# Altium PCB COMECA-TestPCB.PcbDoc
Units mil, origin at the board's own origin, x right, y up, seen from the top; angles counter-clockwise.
Board outline 2900 x 3900 mil, 2 copper layers (Top Layer, Bottom Layer); 19 components, 25 nets, 161 pads, 2 vias.
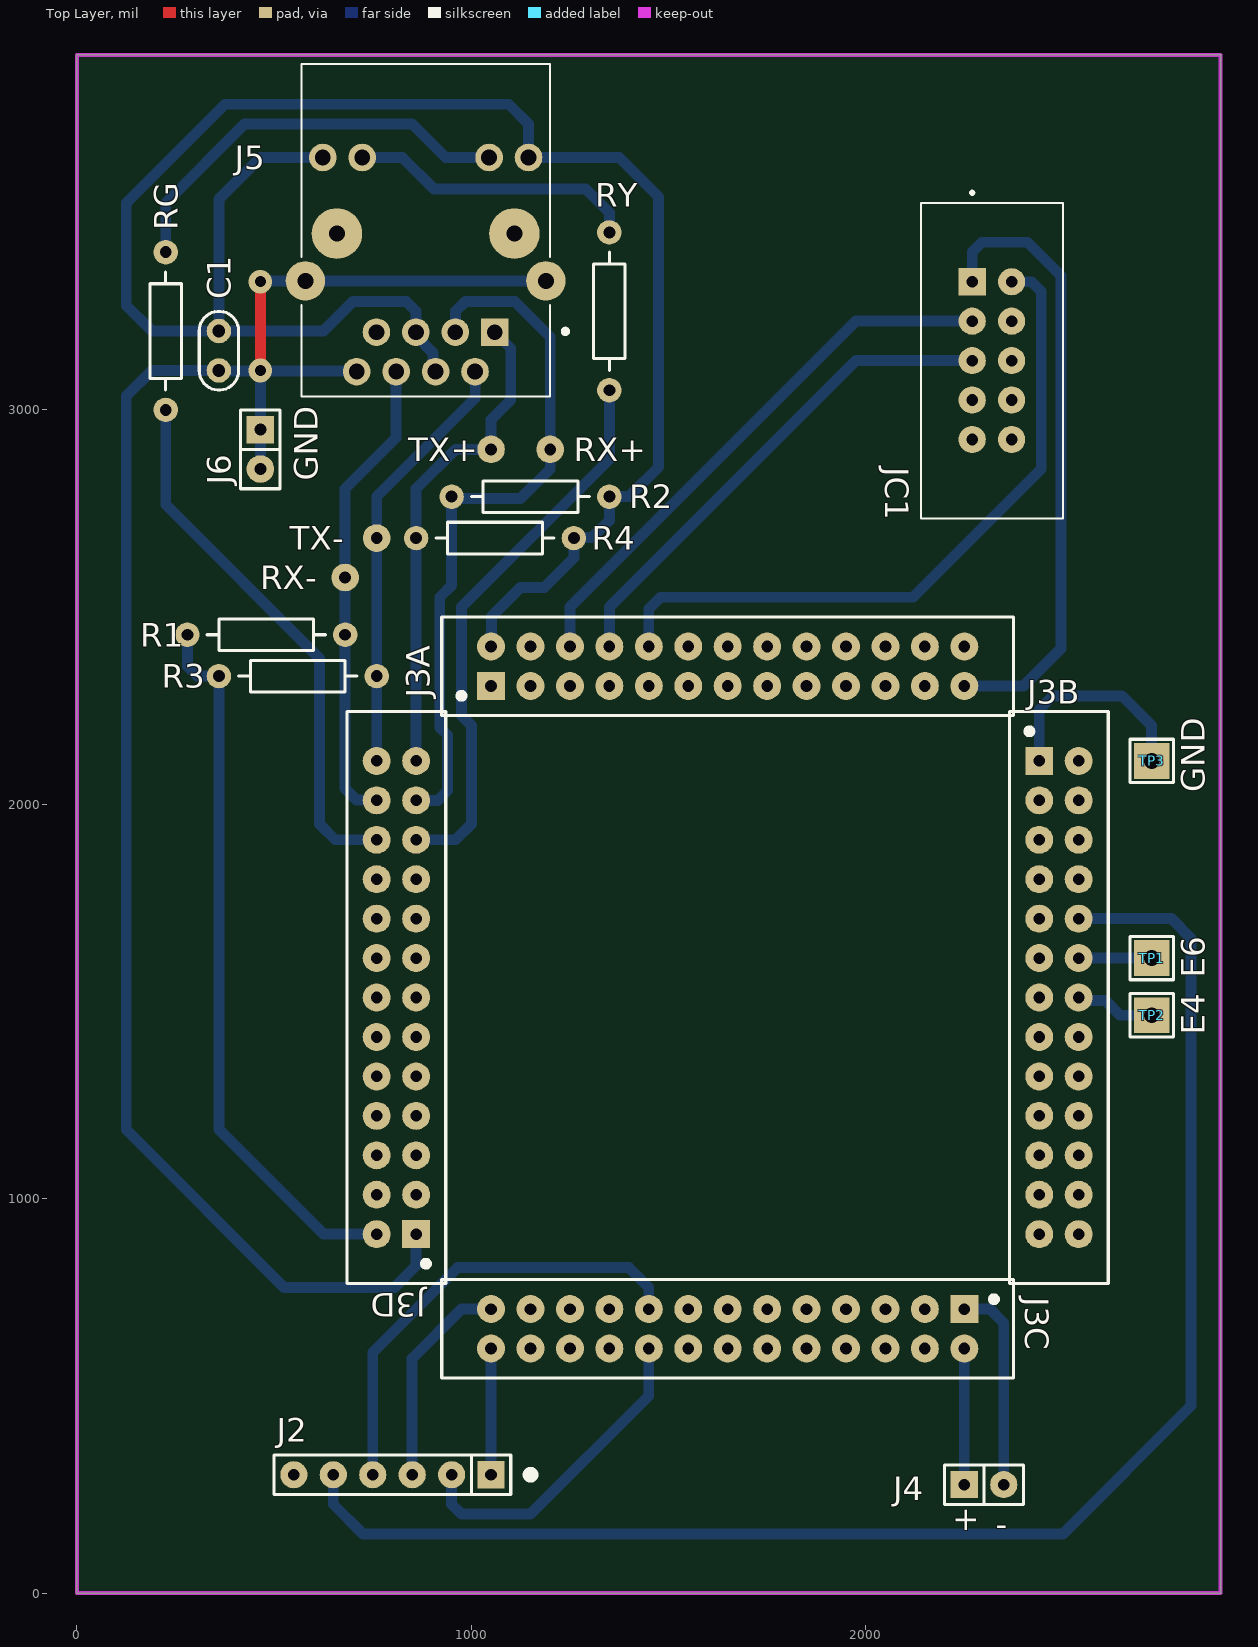
[diagram p0: Top Layer view]
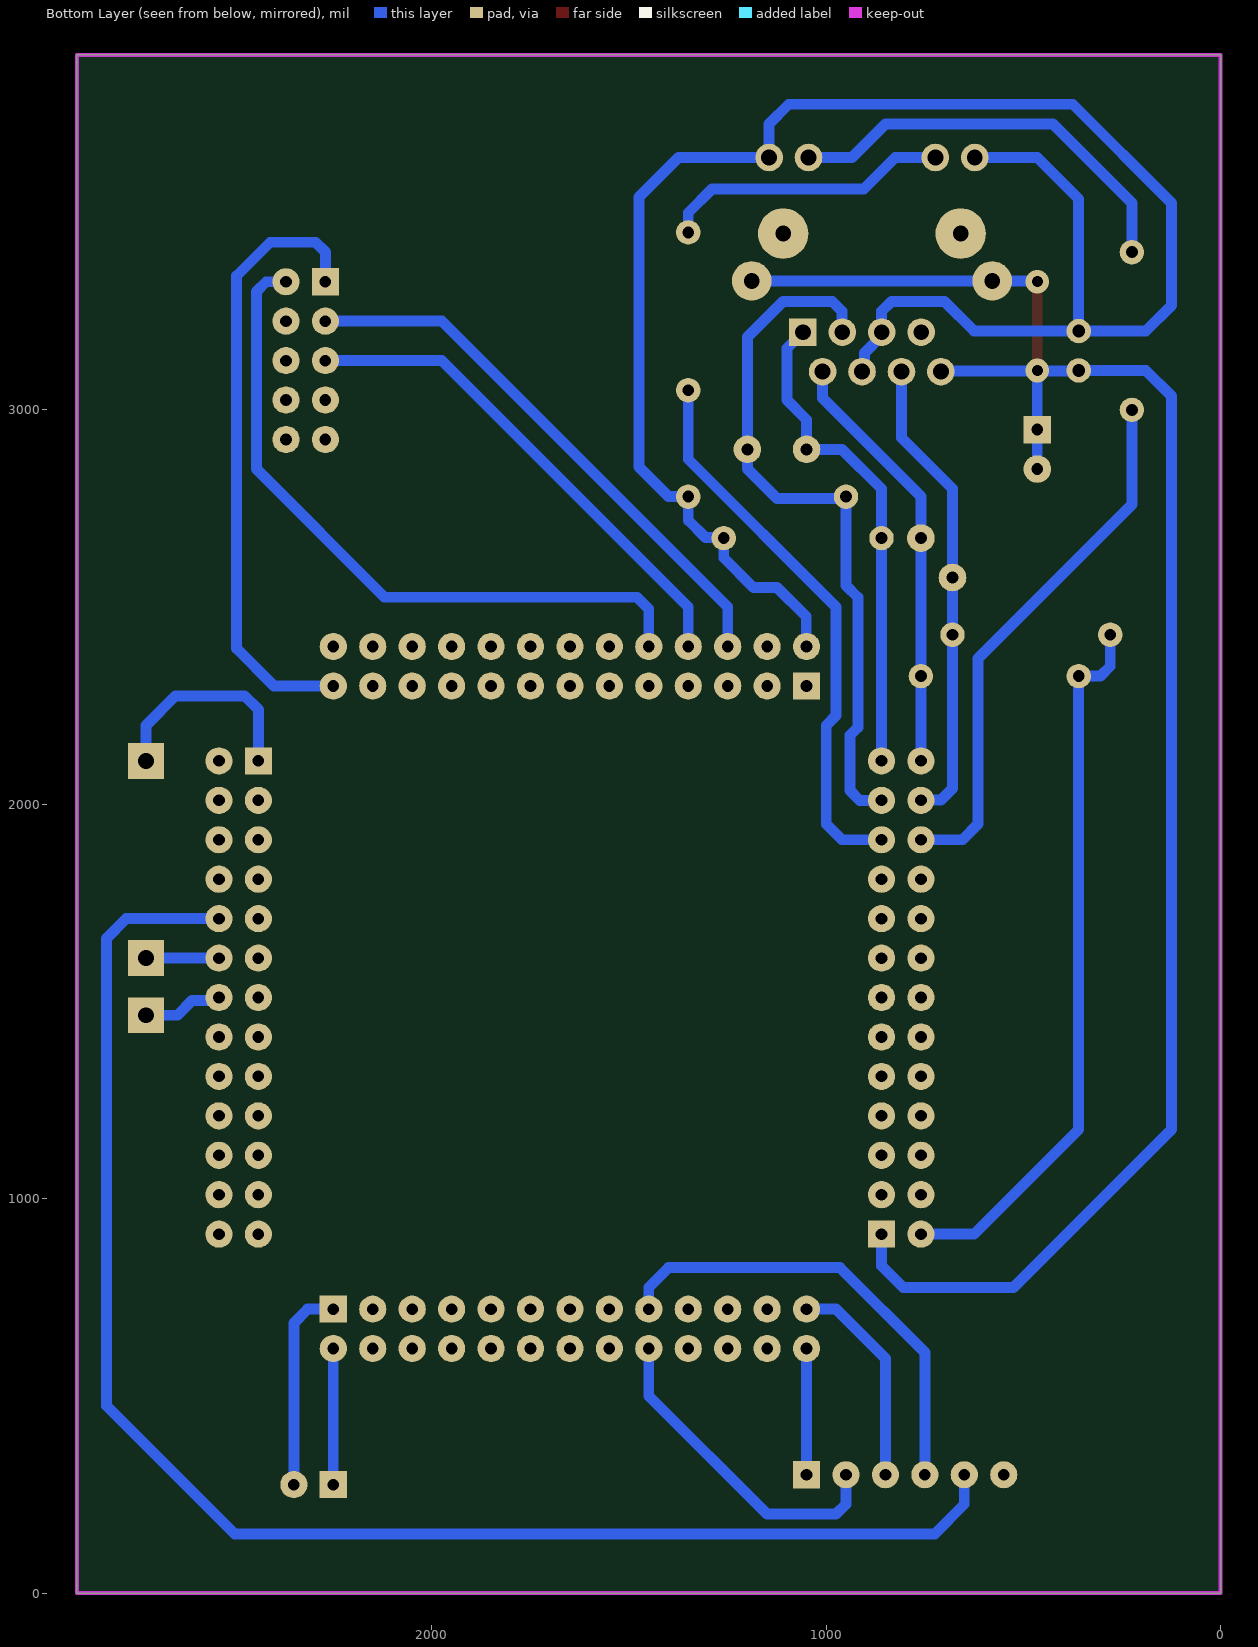
[diagram p1: Bottom Layer view, seen from below]

## Layer stack, top to bottom
Top Solder: solder mask 0.4, Solder Resist, Dk 3.5
Top Layer: signal copper 1.4
Dielectric 1: dielectric 12.6, FR-4, Dk 4.8
Bottom Layer: signal copper 1.4
Bottom Solder: solder mask 0.4, Solder Resist, Dk 3.5

## Board outline
0,0 2900,0 2900,3900 0,3900

## Design rules (kind name [scope] priority, off if disabled: settings)
Clearance [All] p1: gap=19.68 ignorepadtopadclearanceinfootprint=FALSE
PolygonConnect [All] p1: connectstyle=Relief reliefconductorwidth=10 reliefentries=4 polygonreliefangle="90 Angle" airgapwidth=10
RoutingVias [All] p1: holewidth=28 width=50 viastyle="Through Hole" minholewidth=28 minwidth=50 maxholewidth=28 maxwidth=60
SolderMaskExpansion [All] p1: expansion=4 istentingtop=FALSE
Width [All] p1: maxlimit=39.37 minlimit=19.68 preferedwidth=27.56
30 further rules are at their usual default settings.

## Components (designator, comment, footprint, x,y, rotation, side; value= is the part's Value field where it differs from the comment)
C1 "33nF" CAP100 360,3150 r270 top
J2 "PROGRAMADOR" SIP6 1050,300 r180 top
J3A "SIP13" "SIP13*2 - HDR" 1050,2300 r0 top
J3B "SIP13" "SIP13*2 - HDR" 2440,2110 r270 top
J3C "SIP13" "SIP13*2 - HDR" 2250,720 r180 top
J3D "SIP13" "SIP13*2 - HDR" 860,910 r90 top
J4 "VCC_EXT" SIP2#1 2300,275 r0 top
J5 "HR911105A" HANRUN_HR911105A 884.17,3447.09 r0 top
J6 "GND" SIP2#2 465,2900 r270 top
JC1 "CAL_TEST" "TE_5104338-1 - 90DEG" 2270,3325 r90 top
R1 "49" RES400 680,2430 r180 top
R2 "49" RES400 950,2780 r0 top
R3 "49" RES400 760,2325 r180 top
R4 "49" RES400 860,2675 r0 top
RG "330" RES400 225,3000 r90 top
RY "330" RES400 1350,3050 r90 top
TP1 "E6" TPTH 2725,1610 r0 top
TP2 "E4" TPTH 2725,1465 r0 top
TP3 "GND-3" TPTH 2725,2110 r0 top

## Footprints (in the part's own frame and the unit in brackets; to place one, negate y for a bottom-side part, rotate by r counter-clockwise, add the part's x,y. Pads: shape width x height; smd on the part's side, far side on the other; paste and mask are expansions set on the pad)
CAP100 [mil]
  round 62 hole 32: 1(-50,0) 2(50,0)
  silkscreen extent -100,-50 100,50, body extent -115,-33 115,34, height 241
HANRUN_HR911105A [mil]
  rect 70x70 hole 40: 1(175.2,-250)
  round 70 hole 40: 2(125.2,-350) 3(75.2,-250) 4(25.2,-350) 5(-24.8,-250) 6(-74.8,-350) 7(-124.8,-250) 8(-174.8,-350) 9(260.83,192.91) 10(160.83,192.91) 11(-160.83,192.91) 12(-260.83,192.91)
  round 100 hole 40: 15(304.92,-120.08) 16(-304.92,-120.08)
  round 127.95 hole 40 unplated: ""(-225,0) ""(225,0)
  silkscreen extent -315,-413 360,430
RES400 [mil]
  round 62 hole 30: 1(0,0) 2(400,0)
  silkscreen extent 50,-40 350,40, body extent -12,-45 412,46, height 96
SIP2#1 [mm]
  rect 1.75x1.75 hole 0.75: 1(-1.27,0)
  round 1.75 hole 0.75: 2(1.27,0)
  silkscreen extent -2.54,-1.27 2.54,1.27
SIP2#2 [mm]
  rect 1.778x1.778 hole 0.762: 1(-1.27,0)
  round 1.778 hole 0.762: 2(1.27,0)
  silkscreen extent -2.54,-1.27 2.54,1.27
SIP6 [mm]
  rect 1.75x1.75 hole 0.75: 1(0,0)
  round 1.75 hole 0.75: 2(2.54,0) 3(5.08,0) 4(7.62,0) 5(10.16,0) 6(12.7,0)
  silkscreen extent -1.27,-1.27 13.97,1.27, body extent -1.27,-1.3 13.97,1.24, height 8.38
"SIP13*2 - HDR" [mm]
  rect 1.8x1.8 / inner rect 1.75x1.75 / far side rect 1.75x1.75 hole 0.75: 1(0,0)
  round 1.8 / inner round 1.75 / far side round 1.75 hole 0.75: 2(0,2.54) 3(2.54,0) 4(2.54,2.54) 5(5.08,0) 6(5.08,2.54) 7(7.62,0) 8(7.62,2.54) 9(10.16,0) 10(10.16,2.54) 11(12.7,0) 12(12.7,2.54) 13(15.24,0) 14(15.24,2.54) 15(17.78,0) 16(17.78,2.54) 17(20.32,0) 18(20.32,2.54) 19(22.86,0) 20(22.86,2.54) 21(25.4,0) 22(25.4,2.54) 23(27.94,0) 24(27.94,2.54) 25(30.48,0) 26(30.48,2.54)
  silkscreen extent -3.17,-1.91 33.65,4.44, body extent -1.52,-1.21 32,3.75, height 8.51
"TE_5104338-1 - 90DEG" [mm]
  rect 1.75x1.75 hole 0.75: 1(0,0)
  round 1.75 hole 0.75: 2(0,-2.54) 3(-2.54,0) 4(-2.54,-2.54) 5(-5.08,0) 6(-5.08,-2.54) 7(-7.62,0) 8(-7.62,-2.54) 9(-10.16,0) 10(-10.16,-2.54)
  silkscreen extent -15.24,-5.84 5.83,3.3, body extent -15.24,-12.19 5.08,0.32, height 9.27
TPTH [mm]
  rect 2.3x2.3 hole 1.016: 1(0,0)
  silkscreen extent -1.4,-1.4 1.4,1.4, body extent -1.27,-1.27 1.27,1.27, height 6.04

## Part data
C1: library part CAP
J2: library part CON6
J3A J3B J3C J3D: library part CON13*2
J4 J6: library part CON2
J5: "HR911105A Ethernet Interface Arduino Platform Evaluation Expansion Board", Package=None, Availability=Unavailable, MF=DFRobot, MP=HR911105A, Price=None, SnapEDA_Link=https://www.snapeda.com/parts/HR911105A/DFRobot/view-part/214807/?ref=snap
JC1: library part 5104338-1, "HEADER; PIN; AMP-LATCH; 10 POS; 2.54 X 2.54; VERTICAL; LOW PROFILE; PCB", Package=None, Availability=Unavailable, MF="TE Connectivity", MP=5104338-1, Price=None, SnapEDA_Link=https://www.snapeda.com/parts/5104338-1/TE%20Connectivity%20AMP%20Connectors/view-part/2881080/?ref=snap, TE_purchase_URL=https://www.te.com/usa-en/product-5104338-1.html?te_bu=Cor&te_type=disp&te_campaign=seda_glo_cor-seda-global-disp-prtnr-fy19-seda-model-bom-cta_sma-317_1&elqCampaignId=32493
R1 R2 R3 R4 RG RY: library part RES
TP1 TP2 TP3: library part TP

## Free pads (board coordinates)
  round 70 hole 30: 2(680,2575) 4(760,2675) 5(1050,2900) 6(1200,2900)

## Via types
v1: diameter 60, hole 28, Top Layer to Bottom Layer, 2 vias

## Nets (pads, with @x,y where several pads share a name; then routed paths per layer and width w, separated by ;. In a path a pad name is that pad's centre, name@x,y a point inside that pad or via, vN(x,y) a via of type N, cw(c..) or ccw(c..) an arc to the next point about the centre after c; other vN are vias at no path point)
3V3: J2.1 J3C.26 | length 320
  Bottom Layer w27.56: J2.1 J3C.26
3V3-1: C1.1 J3A.2 J5.4 J5.5 J5.9 J5.12 R2.2 R4.2 | length 4886.6
  Bottom Layer w27.56: J5.12 465,3640 360,3535 C1.1 ; J5.4 903.16,3103.29 903.16,3144.52 859.37,3188.31 J5.5 860,3197.72 860,3250 835,3275 700,3275 625,3200 C1.1 ; J3A.2 1050.79,2400.79 1050.79,2475.79 1125,2550 1185,2550 1260,2625 R4.2 1261.09,2676.09 1306.09,2676.09 1350,2720 R2.2 1400,2780 1475,2855 1475,3540 1375,3640 J5.9 1145,3725 1095,3775 375,3775 125,3525 125,3265 190,3200 C1.1
3V3-2: J3D.2 R1.2 R3.2 | length 1830.1
  Bottom Layer w27.56: R1.2 280,2350 305,2325 R3.2 360,1175 625,910 J3D.2
CLK: J3A.6 JC1.3 | length 1420.3
  Bottom Layer w27.56: J3A.6 1250,2500 1975,3225 JC1.3
DATA: J3A.10 JC1.2 | length 1772.4
  Bottom Layer w27.56: J3A.10 1450,2495 1480,2525 2120,2525 2445,2850 2445,3300 2420,3325 JC1.2
GND: J2.3 J3C.25 | length 546.8
  Bottom Layer w27.56: J2.3 850,595 975,720 J3C.25
GND-1: J3A.25 JC1.1 | length 1574.9
  Bottom Layer w27.56: J3A.25 2400,2300 2495,2395 2495,3340 2410,3425 2295,3425 2270,3400 JC1.1
GND-2: C1.2 J3D.1 J5.8 J5.15 J5.16 J6.1 J6.2 | length 4675.9
  Top Layer w27.56: v1(465,3100) v1(465,3325)
  Bottom Layer w27.56: J6.2 J6.1 v1@465,3098.54 ; v1(465,3100) v1@465,3098.54 ; v1(465,3325) 467.01,3327.01 J5.16 J5.15 ; J5.8 707.91,3098.54 v1@465,3098.54 ; J3D.1 860,830 805,775 525,775 125,1175 125,3035 190,3100 C1.2 361.46,3098.54 v1@465,3098.54
GND_EXT: J3C.1 J4.2 | length 528
  Bottom Layer w27.56: J3C.1 2315,720 2350,685 J4.2 J4.2@2352.5,277.5
LED1: J3D.22 RG.1 | length 1373.1
  Bottom Layer w27.56: RG.1 225,2760 615,2370 615,1950 655,1910 J3D.22
LED2: J3D.21 RY.1 | length 1422.3
  Bottom Layer w27.56: J3D.21 960,1910 1000,1950 1000,2200 975,2225 975,2500 1350,2875 RY.1
NetJ3B_1: J3B.1 TP3.1 | length 550.6
  Bottom Layer w27.56: J3B.1 2440,2240 2475,2275 2650,2275 2725,2200 TP3.1
NetJ3B_12: J3B.12 TP1.1 | length 185
  Bottom Layer w27.56: J3B.12 TP1.1
NetJ3B_14: J3B.14 TP2.1 | length 203.6
  Bottom Layer w27.56: J3B.14 2547.91,1502.09 2607.91,1502.09 2645,1465 TP2.1
NetJ5_10: J5.10 RG.2 | length 1063.1
  Bottom Layer w27.56: RG.2 225,3525 425,3725 850,3725 935,3640 J5.10
NetJ5_11: J5.11 RY.2 | length 734.6
  Bottom Layer w27.56: J5.11 825,3640 905,3560 1290,3560 1350,3500 RY.2
PA13: J2.4 J3C.17 | length 1174.8
  Bottom Layer w27.56: J2.4 750,610 965,825 1400,825 1450,775 J3C.17
PA14: J2.2 J3C.18 | length 829.6
  Bottom Layer w27.56: J2.2 950,225 975,200 1150,200 1450,500 J3C.18
REQ: J3A.8 JC1.5 | length 1278.9
  Bottom Layer w27.56: J3A.8 1350,2500 1975,3125 JC1.5
RST: J2.5 J3B.10 | length 3906.4
  Bottom Layer w27.56: J2.5 650,225 725,150 2500,150 2825,475 2825,1660 2775,1710 J3B.10
RX+: J3D.23 J5.3 pad.6 R2.1 | length 1815
  Bottom Layer w27.56: J3D.23 915,2010 940,2035 940,2175 920,2195 920,2525 950,2555 R2.1 955,2775 1125,2775 1200,2850 1200,3185 1110,3275 985,3275 960,3250 960,3197.72 J5.3
RX-: J3D.24 J5.6 pad.2 R1.1 | length 1204
  Bottom Layer w27.56: J3D.24 758.97,2011.03 708.97,2011.03 680,2040 R1.1 680,2800 809.37,2929.37 J5.6 J5.6@810,3096.46
TX+: J3D.25 J5.1 pad.5 R4.1 | length 1256
  Bottom Layer w27.56: J3D.25 R4.1 860,2800 960,2900 pad.5 1050,2975 1100,3025 1100,3156.46 J5.1
TX-: J3D.26 J5.2 pad.4 R3.1 | length 1090.9
  Bottom Layer w27.56: J3D.26 R3.1 760,2780 1010,3030 1010,3096.46 J5.2
VCC_EXT: J3C.2 J4.1 | length 345
  Bottom Layer w27.56: J4.1 J3C.2
pads on no net: J2.6 J3A.1 J3A.3 J3A.4 J3A.5 J3A.7 J3A.9 J3A.11 J3A.12 J3A.13 J3A.14 J3A.15 J3A.16 J3A.17 J3A.18 J3A.19 J3A.20 J3A.21 J3A.22 J3A.23 J3A.24 J3A.26 J3B.2 J3B.3 J3B.4 J3B.5 J3B.6 J3B.7 J3B.8 J3B.9 J3B.11 J3B.13 J3B.15 J3B.16 J3B.17 J3B.18 J3B.19 J3B.20 J3B.21 J3B.22 J3B.23 J3B.24 J3B.25 J3B.26 J3C.3 J3C.4 J3C.5 J3C.6 J3C.7 J3C.8 J3C.9 J3C.10 J3C.11 J3C.12 J3C.13 J3C.14 J3C.15 J3C.16 J3C.19 J3C.20 J3C.21 J3C.22 J3C.23 J3C.24 J3D.3 J3D.4 J3D.5 J3D.6 J3D.7 J3D.8 J3D.9 J3D.10 J3D.11 J3D.12 J3D.13 J3D.14 J3D.15 J3D.16 J3D.17 J3D.18 J3D.19 J3D.20 J5. J5.7 JC1.4 JC1.6 JC1.7 JC1.8 JC1.9 JC1.10
copper on no net: | length 0

## Keep-outs
Keep-Out Layer:
  the board outline again, w10

## Silkscreen, mask and mechanical layers (free items; w line width, h text height)
Top Overlay:
  circle w19.68: c1150,300 r10
  text "TX+" at 840,2870 h60
  text "RX+" at 1260,2870 h60
  text "GND" at 610,2820 h60 r90
  text "TX-" at 540,2645 h60
  text "RX-" at 465,2545 h60
  text "GND" at 2860,2030 h60 r90
  text "E6" at 2860,1560 h60 r90
  text "E4" at 2860,1415 h60 r90
  text "+" at 2280,150 h60 r90
  text "-" at 2330,145.01 h60